# Altium PCB PCB1.PcbDoc
Units mm, origin at the board's own origin, x right, y up, seen from the top; angles counter-clockwise.
Board outline 56.26 x 45.72 mm, 2 copper layers (Top Layer, Bottom Layer); 22 components, 18 nets, 75 pads, 1 vias.
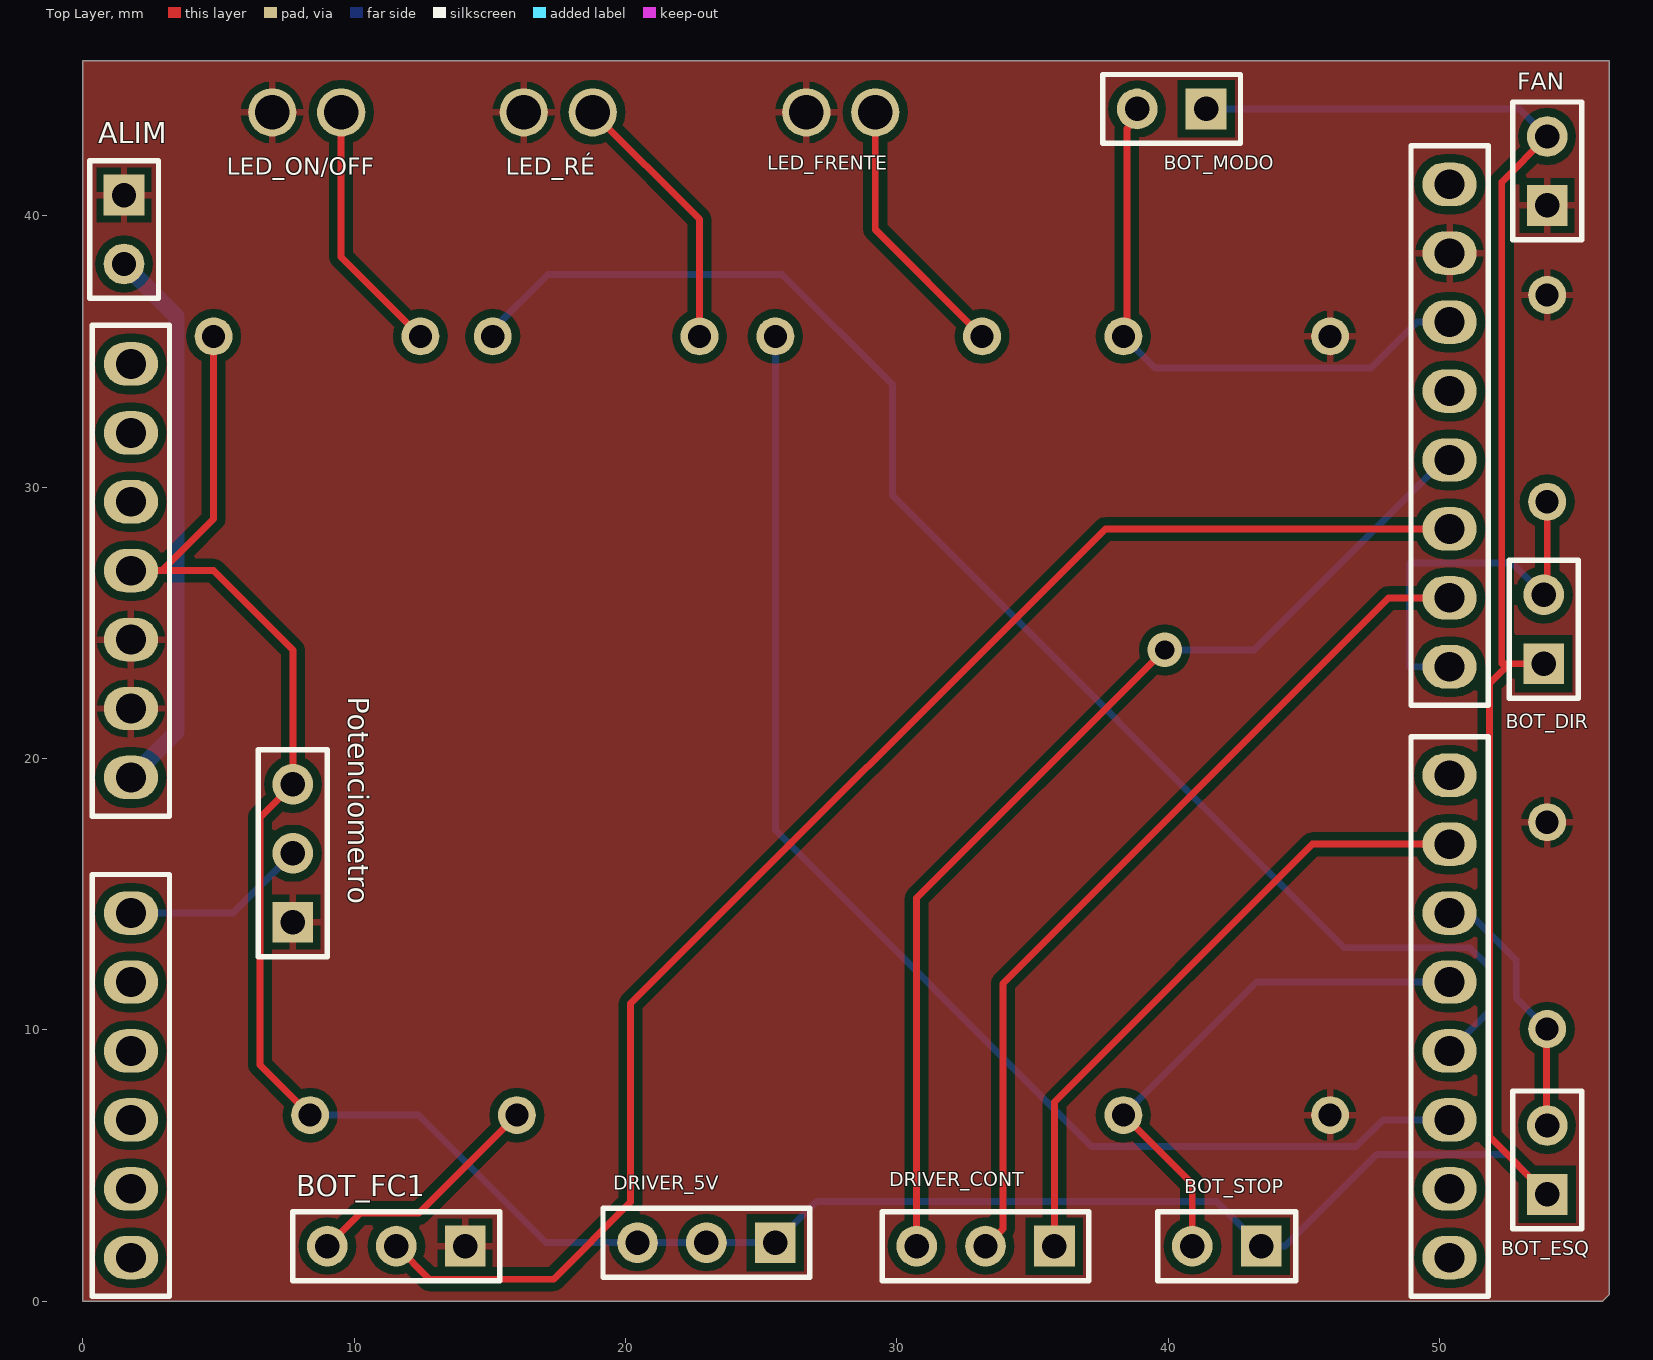
[diagram p0: Top Layer view]
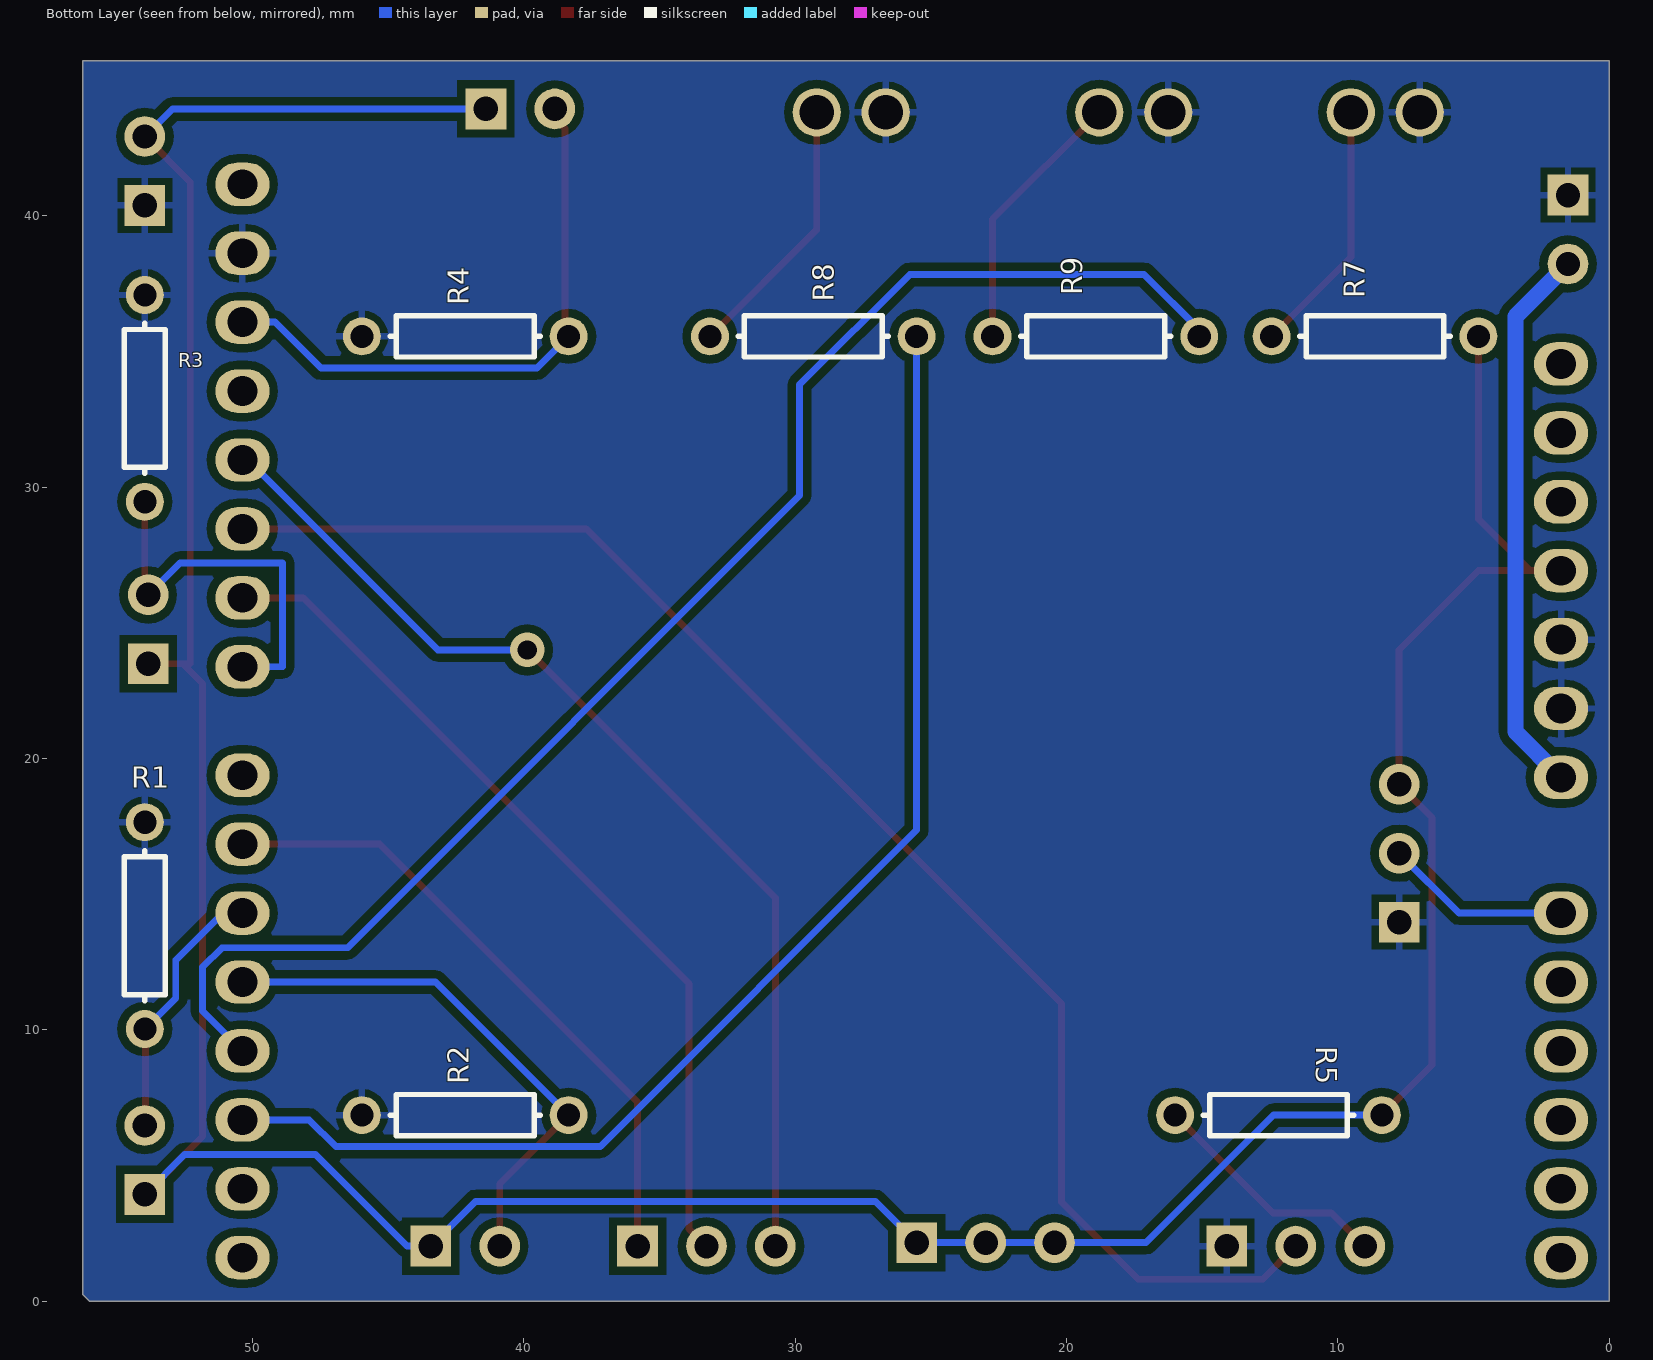
[diagram p1: Bottom Layer view, seen from below]

## Layer stack, top to bottom
Top Solder: solder mask 0.0102, Solder Resist, Dk 3.5
Top Layer: signal copper 0.0356
Dielectric 1: dielectric 0.32, FR-4, Dk 4.8
Bottom Layer: signal copper 0.0356
Bottom Solder: solder mask 0.0102, Solder Resist, Dk 3.5

## Board outline
0.003,-0.003 56.01,-0.003 56.264,0.251 56.264,45.717 0.003,45.717
cut-out: 0,36.703

## Design rules (kind name [scope] priority, off if disabled: settings)
Clearance [All] p1: gap=0.3 ignorepadtopadclearanceinfootprint=FALSE except(0.15: SMDPad-Text THPad-Text; 0.33: Arc-THPad Track-THPad; 0.5: THPad-THPad)
HoleSize [All] p1: absolutevalues=TRUE maxlimit=2.54 minlimit=0.15 maxpercent=80.000 minpercent=20.000
PolygonConnect [All] p1: connectstyle=Relief reliefconductorwidth=0.254 reliefentries=4 polygonreliefangle="90 Angle" airgapwidth=0.254
RoutingVias [All] p1: holewidth=0.711 width=1.27 viastyle="Through Hole" minholewidth=0.711 minwidth=1.27 maxholewidth=0.711 maxwidth=1.27
SilkToSilkClearance [All] p1: silktosilkclearance=0.127
SilkToSolderMaskClearance [IsPad] p1: minsilkscreentomaskgap=0.127 clearancetoexposedcopper=TRUE
SolderMaskExpansion [All] p1: expansion=0.102 istentingtop=FALSE
Width [All] p1: maxlimit=0.6 minlimit=0.254 preferedwidth=0.254
27 further rules are at their usual default settings.

## Classes and differential pairs
net class NoGND: 5V 9V Bot_Dir Bot_Esq Bot_Fc1 Bot_Modo Bot_Stop Dir EN Led_Frente Led_Ré NetBOT_FC1_3 NetLED_FRENTE_1 NetLED_ON/OFF_1 NetLED_RÉ_1 Poten Step

## Components (designator, comment, footprint, x,y, rotation, side; value= is the part's Value field where it differs from the comment)
ALIM "Header 2" HDR1X2 1.524,40.767 r270 top
BOT_DIR "Header 2" HDR1X2 53.848,23.495 r90 top
BOT_ESQ "Header 2" HDR1X2 53.975,3.937 r90 top
BOT_FC1 "Header 3" HDR1X3 14.097,2.032 r180 top
BOT_MODO "Header 2" HDR1X2 41.402,43.942 r180 top (schematic designator BOT_Modo)
BOT_STOP "Header 2" HDR1X2 43.434,2.032 r180 top
DRIVER_5V "Header 3" HDR1X3 25.527,2.159 r180 top
DRIVER_CONT "Header 3" HDR1X3 35.814,2.032 r180 top
FAN "Header 2" HDR1X2 53.975,40.386 r90 top
LED_FRENTE "LED0" LED-0 27.94,43.815 r0 top
LED_ON/OFF "LED0" LED-0 8.255,43.815 r0 top
LED_RÉ "LED0" LED-0 17.526,43.815 r0 top
Potenciometro "Header 3" HDR1X3 7.747,13.97 r90 top
R1 "Res1" AXIAL-0.3 53.975,13.843 r270 bottom value=10K
R2 "Res1" AXIAL-0.3 42.164,6.858 r180 bottom value=10K
R3 "Res1" AXIAL-0.3 53.975,33.274 r270 bottom value=10K
R4 "Res1" AXIAL-0.3 42.164,35.56 r0 bottom value=10K
R5 "Res1" AXIAL-0.3 12.192,6.858 r180 bottom value=1K
R7 "Res1" AXIAL-0.3 8.636,35.56 r0 bottom value=1K
R8 "Res1" AXIAL-0.3 29.337,35.56 r0 bottom value=1K
R9 "Res1" AXIAL-0.3 18.923,35.56 r0 bottom value=1K
S? "SHIELD_ARDUINO_UNO" SHIELD_ARDUINO 50.378,1.604 r0 top

## Footprints (in the part's own frame and the unit in brackets; to place one, negate y for a bottom-side part, rotate by r counter-clockwise, add the part's x,y. Pads: shape width x height; smd on the part's side, far side on the other; paste and mask are expansions set on the pad)
AXIAL-0.3 [mm] "Axial Device, Thru-Hole; 2 Leads; 0.3 in Pin Spacing"
  round 1.4 hole 0.85: 1(-3.81,0) 2(3.81,0)
  silkscreen extent -2.77,-0.76 2.77,0.76
HDR1X2 [mm] "Connector; Header; 2 Position"
  rect 1.5x1.5 hole 0.9: 1(0,0)
  round 1.5 hole 0.9: 2(2.54,0)
  silkscreen extent -1.27,-1.27 3.81,1.27
HDR1X3 [mm] "Connector; Header; 3 Position"
  rect 1.5x1.5 hole 0.9: 1(0,0)
  round 1.5 hole 0.9: 2(2.54,0) 3(5.08,0)
  silkscreen extent -1.27,-1.27 6.35,1.27
LED-0 [mil] "LED; 2 Leads"
  round 70 hole 50: 1(50,0) 2(-50,0)
SHIELD_ARDUINO [mm]
  oval 2x1.6 hole 1.1: 0(0,0) 1(0,2.54) 2(0,5.08) 3(0,7.62) 3.3V(-48.6,27.86) 4(0,10.16) 5(0,12.7) 5V(-48.6,25.32) 6(0,15.24) 7(0,17.78) 8(0,21.78) 9(0,24.32) 10(0,26.86) 11(0,29.4) 12(0,31.94) 13(0,34.48) A0(-48.6,12.7) A1(-48.6,10.16) A2(-48.6,7.62) A3(-48.6,5.08) A4(-48.6,2.54) A5(-48.6,0) AREF(0,39.56) GND(-48.6,20.24) GND(-48.6,22.78) GND(0,37.02) IREF(-48.6,32.94) RESET(-48.6,30.4) VIN(-48.6,17.7)
  silkscreen extent -50.02,-1.42 1.42,40.98, body extent -49.84,-1.3 1.3,40.8, height 11.55

## Part data
ALIM BOT_DIR BOT_ESQ BOT_MODO BOT_STOP FAN: "Header, 2-Pin", LatestRevisionDate=17-Jul-2002, LatestRevisionNote="Re-released for DXP Platform.", Publisher="Altium Limited"
BOT_FC1 DRIVER_5V DRIVER_CONT Potenciometro: "Header, 3-Pin", LatestRevisionDate=17-Jul-2002, LatestRevisionNote="Re-released for DXP Platform.", Publisher="Altium Limited"
LED_FRENTE LED_ON/OFF LED_RÉ: "Typical INFRARED GaAs LED", LatestRevisionDate=08-Jul-2005, LatestRevisionNote="Mech Layer 1 removed.", PackageDescription="LED; 2 Leads", PackageReference=LED-0, Published=8-Jun-2000, Publisher="Altium Limited"
R1 R2 R3 R4 R5 R7 R8 R9: "Resistor", LatestRevisionDate=17-Jul-2002, LatestRevisionNote="Re-released for DXP Platform.", PackageDescription="Axial Device, Thru-Hole; 2 Leads; 0.3 in Pin Spacing", PackageReference=AXIAL-0.3, Published=8-Jun-2000, Publisher="Altium Limited"

## Via types
v1: diameter 1.27, hole 0.711, Top Layer to Bottom Layer, 1 vias

## Nets (pads, with @x,y where several pads share a name; then routed paths per layer and width w, separated by ;. In a path a pad name is that pad's centre, name@x,y a point inside that pad or via, vN(x,y) a via of type N, cw(c..) or ccw(c..) an arc to the next point about the centre after c; other vN are vias at no path point)
5V: BOT_DIR.1 BOT_ESQ.1 BOT_MODO.1 BOT_STOP.1 DRIVER_5V.1 DRIVER_5V.2 DRIVER_5V.3 FAN.2 Potenciometro.3 R5.2 R7.1 S?.5V | length 141.3
  Top Layer w0.254: S?.5V 2.924,26.924 ; R7.1 4.826,28.826 2.924,26.924 ; R5.2 6.531,8.709 6.531,17.834 Potenciometro.3 7.747,24.006 4.829,26.924 2.924,26.924 ; BOT_DIR.1 52.581,23.495 ; BOT_ESQ.1 51.844,6.068 51.844,22.758 52.581,23.495 ; FAN.2 52.301,41.252 52.301,23.495 52.581,23.495
  Bottom Layer w0.254: R5.2 12.369,6.858 17.068,2.159 DRIVER_5V.3 DRIVER_5V.2 DRIVER_5V.1 27.048,3.68 41.786,3.68 BOT_STOP.1 44.316,2.032 47.685,5.401 52.511,5.401 BOT_ESQ.1 ; BOT_MODO.1 52.959,43.942 FAN.2
9V: ALIM.2 S?.VIN | length 20.4
  Bottom Layer w0.6: ALIM.2 3.457,36.294 3.457,20.983 S?.VIN
Bot_Dir: BOT_DIR.2 R3.2 S?.8 | length 14.2
  Top Layer w0.254: BOT_DIR.2 53.975,26.162 53.975,27.832 R3.2
  Bottom Layer w0.254: S?.8 48.898,23.384 48.898,27.2 52.683,27.2 BOT_DIR.2
Bot_Esq: BOT_ESQ.2 R1.2 S?.5 | length 9.8
  Top Layer w0.254: BOT_ESQ.2 53.952,6.477 53.952,10.01 R1.2
  Bottom Layer w0.254: S?.5 50.636,14.046 51.359,14.046 52.832,12.573 52.832,11.176 R1.2
Bot_Fc1: BOT_FC1.2 S?.10 | length 55.1
  Top Layer w0.254: BOT_FC1.2 12.779,0.81 17.351,0.81 20.196,3.654 20.196,10.97 37.69,28.464 S?.10
Bot_Modo: BOT_MODO.2 R4.1 S?.13 | length 21.8
  Top Layer w0.254: R4.1 38.481,35.687 38.481,43.224 38.862,43.605 BOT_MODO.2
  Bottom Layer w0.254: R4.1 39.526,34.388 47.481,34.388 49.177,36.084 S?.13
Bot_Stop: BOT_STOP.2 R2.2 S?.4 | length 19.9
  Top Layer w0.254: R2.2 40.894,4.318 BOT_STOP.2
  Bottom Layer w0.254: R2.2 43.26,11.764 S?.4
Dir: DRIVER_CONT.1 S?.6 | length 23.8
  Top Layer w0.254: DRIVER_CONT.1 35.814,7.342 45.316,16.844 S?.6
EN: DRIVER_CONT.3 S?.11 | length 39.2
  Top Layer w0.254: DRIVER_CONT.3 30.734,14.859 v1(39.878,24.003)
  Bottom Layer w0.254: v1(39.878,24.003) 43.177,24.003 50.178,31.004 S?.11
GND: ALIM.1 BOT_FC1.1 FAN.1 LED_FRENTE.2 LED_ON/OFF.2 LED_RÉ.2 Potenciometro.1 R1.1 R2.1 R3.1 R4.2 S?.GND
Led_Frente: R8.1 S?.2 | length 48.3
  Bottom Layer w0.254: R8.1 25.527,17.362 37.188,5.701 46.931,5.701 47.914,6.684 S?.2
Led_Ré: R9.1 S?.3 | length 54.5
  Bottom Layer w0.254: R9.1 15.113,35.814 17.145,37.846 25.781,37.846 29.845,33.782 29.845,29.692 46.51,13.027 51.133,13.027 51.844,12.316 51.844,10.69 S?.3
NetBOT_FC1_3: BOT_FC1.3 R5.1 | length 9
  Top Layer w0.254: BOT_FC1.3 10.233,3.248 12.392,3.248 R5.1
NetLED_FRENTE_1: LED_FRENTE.1 R8.2 | length 9.9
  Top Layer w0.254: LED_FRENTE.1 29.21,39.497 R8.2
NetLED_ON/OFF_1: LED_ON/OFF.1 R7.2 | length 9.5
  Top Layer w0.254: LED_ON/OFF.1 9.525,38.481 R7.2
NetLED_RÉ_1: LED_RÉ.1 R9.2 | length 9.9
  Top Layer w0.254: LED_RÉ.1 22.733,39.878 R9.2
Poten: Potenciometro.2 S?.A0 | length 6.9
  Bottom Layer w0.254: S?.A0 5.541,14.304 Potenciometro.2
Step: DRIVER_CONT.2 S?.9 | length 32.3
  Top Layer w0.254: DRIVER_CONT.2 33.912,2.67 33.912,11.706 48.13,25.924 S?.9
pads on no net: S?.0 S?.1 S?.3.3V S?.7 S?.12 S?.A1 S?.A2 S?.A3 S?.A4 S?.A5 S?.AREF S?.IREF S?.RESET

## Polygon pours and split planes (outlines as drawn)
no net on Mechanical 1 (solid): 8.258,42.288
no net on Mechanical 1 (solid): 8.258,42.288
GND on Bottom Layer "GND_L02_P006" (solid, pour order 6): 0.006,45.72 0.006,0.006 0,0 56.007,0 56.261,0.254 56.261,45.72 0.006,45.72
no net on Bottom Layer "NONET_L02_P009" (solid, pour order 9): 0.254,45.593
no net on Bottom Layer "NONET_L02_P008" (solid, pour order 8): 0.254,45.593
no net on Bottom Layer "NONET_L02_P007" (solid, pour order 7): 0.254,45.593
no net on Bottom Layer "NONET_L02_P005" (solid, pour order 5): 0.006,45.72
GND on Top Layer "GND_L01_P004" (solid, pour order 4): 0.003,45.72 0,45.718 0,0 56.007,0 56.261,0.254 56.261,45.72 0,45.72
no net on Top Layer "NONET_L01_P010" (solid, pour order 10): 0.127,0

## Silkscreen, mask and mechanical layers (free items; w line width, h text height)
Mechanical 1:
  lines w0.254: 0.003,-0.003 56.01,-0.003 56.264,0.251 56.264,45.717 0.003,45.717 0.003,45.209 0.003,-0.003